# EAGLE board MicroView-Panel-v10 (EAGLE 6.5.0), part 1 of 3
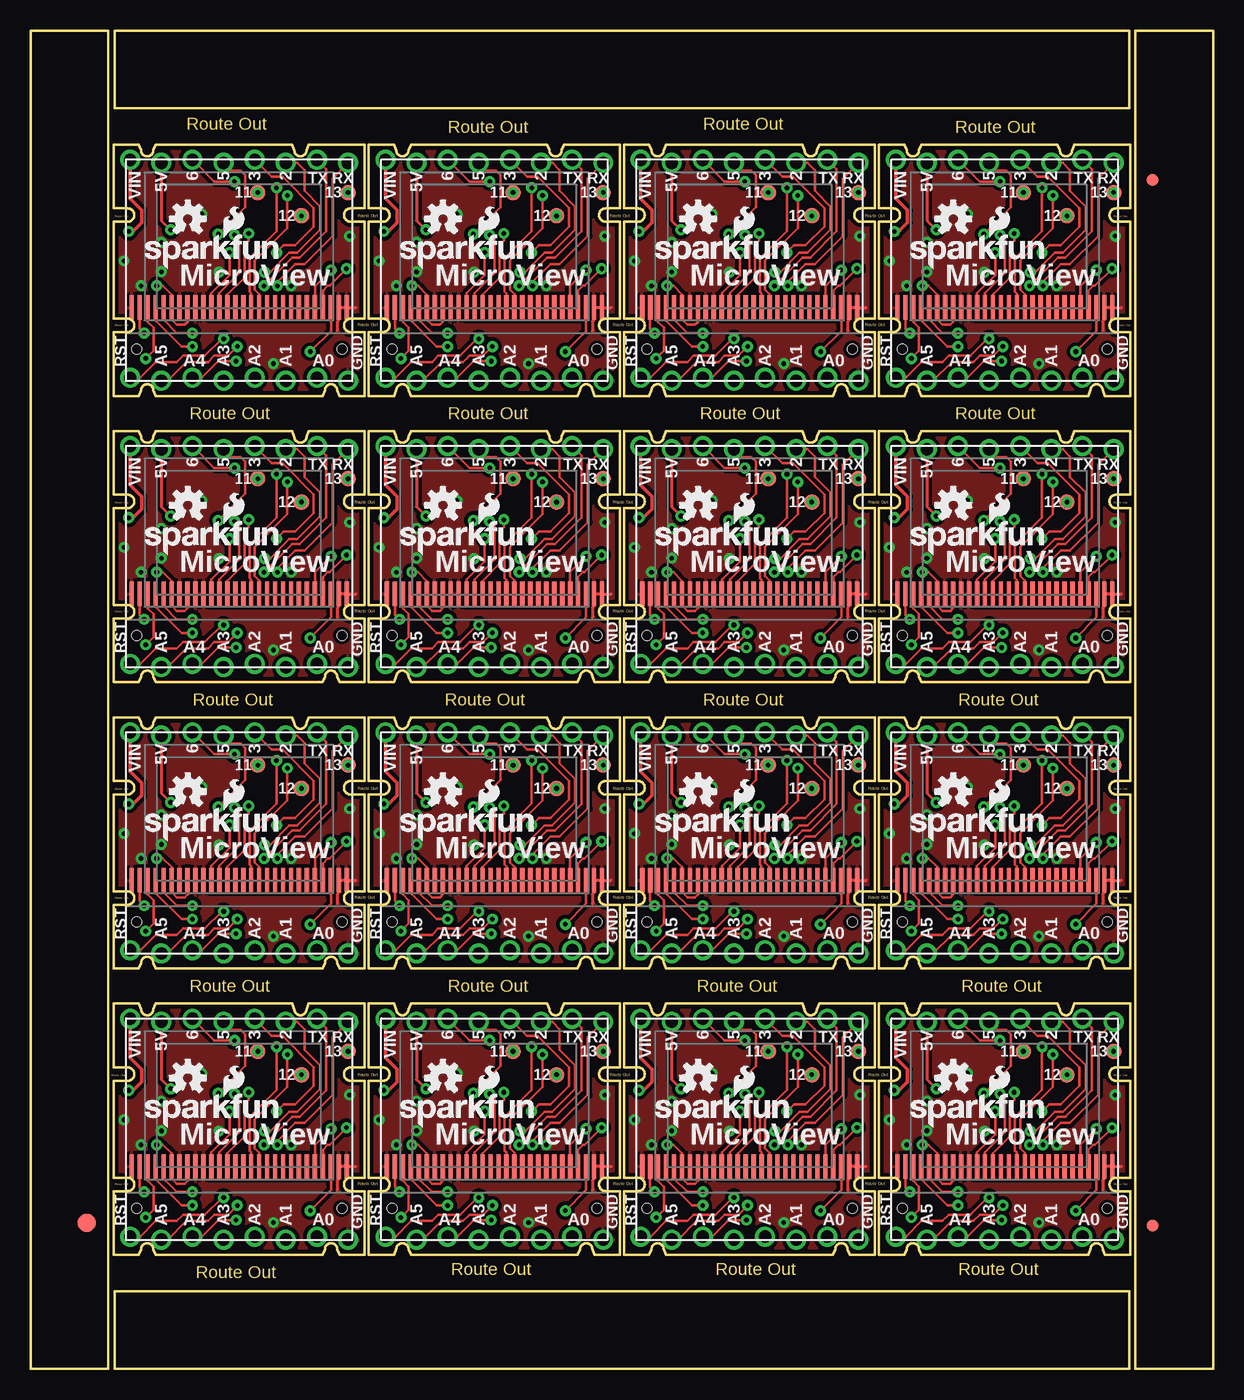
[diagram p0: board, top side]
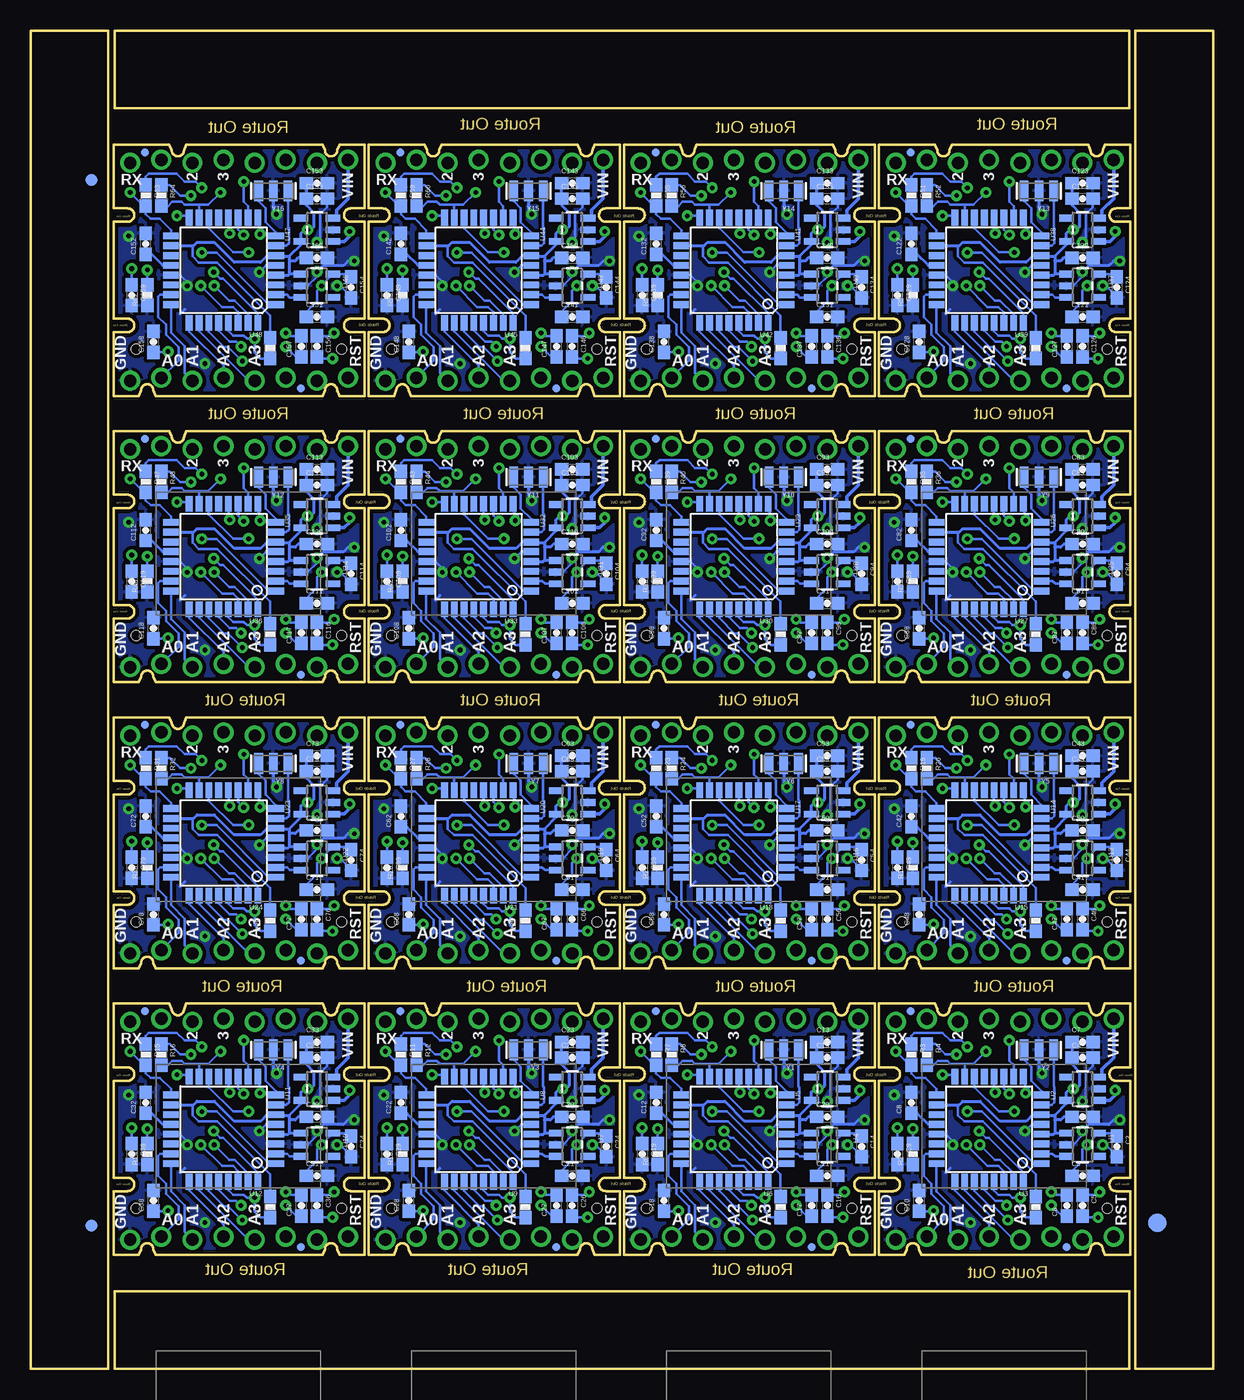
[diagram p1: board, bottom side, seen from below]

Size 96.52 x 109.22 mm. Coordinates in mm from the lower left corner, seen from the top.
Outline: 600 segments
Copper layers (1*16): Top 0.035mm / dielectric 1.5mm / Bottom 0.035mm
Design rules "SparkFun-2-layer *": minimum track width 7mil, minimum drill 15mil, track to track 8mil, track to pad 8mil, pad to pad 8mil, via to via 8mil, smd to smd 8mil, copper to edge 8mil, drill to drill 8mil, minimum pad ring 12mil, minimum via ring 10mil, stop-mask expansion 4mil, vias tented up to drill 20mil, thermal gap 10mil

## Footprints (pad centres in the part's own frame; a part is rotated, then mirrored left to right if it is on the bottom)
0603-CAP = smd 1.1 x 1: 1 -0.85,0; 2 0.85,0
FIDUCIAL-1.5X3 = smd 1.5 x 1.5: 1 0,0
FIDUCIAL-1X2 = smd 1 x 1: 1 0,0
MICRO-FIDUCIAL = smd 0.635 x 0.635: 1 0,0
MV-DIP16 = drill 1.016: 1 -8.89,-8.763; 2 -6.35,-9.017; 3 -3.81,-8.763; 4 -1.27,-9.017; 5 1.27,-8.763; 6 3.81,-9.017; 7 6.35,-8.763; 8 8.89,-9.017; 9 8.89,8.763; 10 6.35,9.017; 11 3.81,8.763; 12 1.27,9.017; 13 -1.27,8.763; 14 -3.81,9.017; 15 -6.35,8.763; 16 -8.89,9.017
OLED-0.66-64X48 = smd 0.35 x 2: 1 0,0; 2 0.65,0; 3 1.3,0; 4 1.95,0; 5 2.6,0; 6 3.25,0; 7 3.9,0; 8 4.55,0; 9 5.2,0; 10 5.85,0; 11 6.5,0; 12 7.15,0; 13 7.8,0; 14 8.45,0; 15 9.1,0; 16 9.75,0; 17 10.4,0; 18 11.05,0; 19 11.7,0; 20 12.35,0; 21 13,0; 22 13.65,0; 23 14.3,0; 24 14.95,0; 25 15.6,0; 26 16.25,0; 27 16.9,0; 28 17.55,0 | hole 0.8: 17.15,-3.4; 0.4,-3.4
0603-RES = smd 1.1 x 1: 1 -0.85,0; 2 0.85,0
PAD.03X.05 = smd 1.27 x 1.27: P$1 0,0
SOT23-5 = smd 0.55 x 1.2: 1 -0.95,-1.3; 2 0,-1.3; 3 0.95,-1.3; 4 0.95,1.3; 5 -0.95,1.3
TQFP32-08 = smd 1.27 x 0.559: 1 -4.293,2.8; 2 -4.293,2; 3 -4.293,1.2; 4 -4.293,0.4; 5 -4.293,-0.4; 6 -4.293,-1.2; 7 -4.293,-2; 8 -4.293,-2.8; 17 4.293,-2.8; 18 4.293,-2; 19 4.293,-1.2; 20 4.293,-0.4; 21 4.293,0.4; 22 4.293,1.2; 23 4.293,2; 24 4.293,2.8 | smd 0.559 x 1.27: 9 -2.8,-4.293; 10 -2,-4.293; 11 -1.2,-4.293; 12 -0.4,-4.293; 13 0.4,-4.293; 14 1.2,-4.293; 15 2,-4.293; 16 2.8,-4.293; 25 2.8,4.293; 26 2,4.293; 27 1.2,4.293; 28 0.4,4.293; 29 -0.4,4.293; 30 -1.2,4.293; 31 -2,4.293; 32 -2.8,4.293
RESONATOR-SMD = smd 0.7 x 1.7: 1 -1.2,0; 2 0,0; 3 1.2,0

## Placement (x,y rotation side)
C1  1.0uF  [0603-CAP]  10.67,20.57 0 bottom
C2  1.0uF  [0603-CAP]  7.87,18.16 270 bottom
C3  0.1uF  [0603-CAP]  10.67,15.75 0 bottom
C4  1.0uF  [0603-CAP]  10.67,25.4 0 bottom
C5  1.0uF  [0603-CAP]  10.67,13.34 270 bottom
C6  1.0uF  [0603-CAP]  11.94,13.34 90 bottom
C7  0.1uF  [0603-CAP]  10.67,26.67 0 bottom
C8  0.1uF  [0603-CAP]  24.64,21.72 90 bottom
C9  2.2uF  [0603-CAP]  25.78,17.53 270 bottom
C10  2.2uF  [0603-CAP]  24,13.72 90 bottom
C11  0.1uF  [0603-CAP]  31.5,15.75 0 bottom
C12  0.1uF  [0603-CAP]  45.47,21.72 90 bottom
C13  0.1uF  [0603-CAP]  31.5,26.67 0 bottom
C14  1.0uF  [0603-CAP]  28.7,18.16 270 bottom
C15  1.0uF  [0603-CAP]  31.5,25.4 0 bottom
C16  1.0uF  [0603-CAP]  31.5,13.34 270 bottom
C17  1.0uF  [0603-CAP]  32.77,13.34 90 bottom
C18  2.2uF  [0603-CAP]  44.83,13.72 90 bottom
C19  2.2uF  [0603-CAP]  46.61,17.53 270 bottom
C20  1.0uF  [0603-CAP]  31.5,20.57 0 bottom
C21  0.1uF  [0603-CAP]  52.32,15.75 0 bottom
C22  0.1uF  [0603-CAP]  66.29,21.72 90 bottom
C23  0.1uF  [0603-CAP]  52.32,26.67 0 bottom
C24  1.0uF  [0603-CAP]  49.53,18.16 270 bottom
C25  1.0uF  [0603-CAP]  52.32,25.4 0 bottom
C26  1.0uF  [0603-CAP]  52.32,13.34 270 bottom
C27  1.0uF  [0603-CAP]  53.59,13.34 90 bottom
C28  2.2uF  [0603-CAP]  65.66,13.72 90 bottom
C29  2.2uF  [0603-CAP]  67.44,17.53 270 bottom
C30  1.0uF  [0603-CAP]  52.32,20.57 0 bottom
C31  0.1uF  [0603-CAP]  73.15,15.75 0 bottom
C32  0.1uF  [0603-CAP]  87.12,21.72 90 bottom
C33  0.1uF  [0603-CAP]  73.15,26.67 0 bottom
C34  1.0uF  [0603-CAP]  70.36,18.16 270 bottom
C35  1.0uF  [0603-CAP]  73.15,25.4 0 bottom
C36  1.0uF  [0603-CAP]  73.15,13.34 270 bottom
C37  1.0uF  [0603-CAP]  74.42,13.34 90 bottom
C38  2.2uF  [0603-CAP]  86.49,13.72 90 bottom
C39  2.2uF  [0603-CAP]  88.27,17.53 270 bottom
C40  1.0uF  [0603-CAP]  73.15,20.57 0 bottom
C41  0.1uF  [0603-CAP]  10.67,39.12 0 bottom
C42  0.1uF  [0603-CAP]  24.64,45.09 90 bottom
C43  0.1uF  [0603-CAP]  10.67,50.04 0 bottom
C44  1.0uF  [0603-CAP]  7.87,41.53 270 bottom
C45  1.0uF  [0603-CAP]  10.67,48.77 0 bottom
C46  1.0uF  [0603-CAP]  10.67,36.7 270 bottom
C47  1.0uF  [0603-CAP]  11.94,36.7 90 bottom
C48  2.2uF  [0603-CAP]  24,37.08 90 bottom
C49  2.2uF  [0603-CAP]  25.78,40.89 270 bottom
C50  1.0uF  [0603-CAP]  10.67,43.94 0 bottom
C51  0.1uF  [0603-CAP]  31.5,39.12 0 bottom
C52  0.1uF  [0603-CAP]  45.47,45.09 90 bottom
C53  0.1uF  [0603-CAP]  31.5,50.04 0 bottom
C54  1.0uF  [0603-CAP]  28.7,41.53 270 bottom
C55  1.0uF  [0603-CAP]  31.5,48.77 0 bottom
C56  1.0uF  [0603-CAP]  31.5,36.7 270 bottom
C57  1.0uF  [0603-CAP]  32.77,36.7 90 bottom
C58  2.2uF  [0603-CAP]  44.83,37.08 90 bottom
C59  2.2uF  [0603-CAP]  46.61,40.89 270 bottom
C60  1.0uF  [0603-CAP]  31.5,43.94 0 bottom
C61  0.1uF  [0603-CAP]  52.32,39.12 0 bottom
C62  0.1uF  [0603-CAP]  66.29,45.09 90 bottom
C63  0.1uF  [0603-CAP]  52.32,50.04 0 bottom
C64  1.0uF  [0603-CAP]  49.53,41.53 270 bottom
C65  1.0uF  [0603-CAP]  52.32,48.77 0 bottom
C66  1.0uF  [0603-CAP]  52.32,36.7 270 bottom
C67  1.0uF  [0603-CAP]  53.59,36.7 90 bottom
C68  2.2uF  [0603-CAP]  65.66,37.08 90 bottom
C69  2.2uF  [0603-CAP]  67.44,40.89 270 bottom
C70  1.0uF  [0603-CAP]  52.32,43.94 0 bottom
C71  0.1uF  [0603-CAP]  73.15,39.12 0 bottom
C72  0.1uF  [0603-CAP]  87.12,45.09 90 bottom
C73  0.1uF  [0603-CAP]  73.15,50.04 0 bottom
C74  1.0uF  [0603-CAP]  70.36,41.53 270 bottom
C75  1.0uF  [0603-CAP]  73.15,48.77 0 bottom
C76  1.0uF  [0603-CAP]  73.15,36.7 270 bottom
C77  1.0uF  [0603-CAP]  74.42,36.7 90 bottom
C78  2.2uF  [0603-CAP]  86.49,37.08 90 bottom
C79  2.2uF  [0603-CAP]  88.27,40.89 270 bottom
C80  1.0uF  [0603-CAP]  73.15,43.94 0 bottom
C81  0.1uF  [0603-CAP]  10.67,62.48 0 bottom
C82  0.1uF  [0603-CAP]  24.64,68.45 90 bottom
C83  0.1uF  [0603-CAP]  10.67,73.41 0 bottom
C84  1.0uF  [0603-CAP]  7.87,64.9 270 bottom
C85  1.0uF  [0603-CAP]  10.67,72.14 0 bottom
C86  1.0uF  [0603-CAP]  10.67,60.07 270 bottom
C87  1.0uF  [0603-CAP]  11.94,60.07 90 bottom
C88  2.2uF  [0603-CAP]  24,60.45 90 bottom
C89  2.2uF  [0603-CAP]  25.78,64.26 270 bottom
C90  1.0uF  [0603-CAP]  10.67,67.31 0 bottom
C91  0.1uF  [0603-CAP]  31.5,62.48 0 bottom
C92  0.1uF  [0603-CAP]  45.47,68.45 90 bottom
C93  0.1uF  [0603-CAP]  31.5,73.41 0 bottom
C94  1.0uF  [0603-CAP]  28.7,64.9 270 bottom
C95  1.0uF  [0603-CAP]  31.5,72.14 0 bottom
C96  1.0uF  [0603-CAP]  31.5,60.07 270 bottom
C97  1.0uF  [0603-CAP]  32.77,60.07 90 bottom
C98  2.2uF  [0603-CAP]  44.83,60.45 90 bottom
C99  2.2uF  [0603-CAP]  46.61,64.26 270 bottom
C100  1.0uF  [0603-CAP]  31.5,67.31 0 bottom
C101  0.1uF  [0603-CAP]  52.32,62.48 0 bottom
C102  0.1uF  [0603-CAP]  66.29,68.45 90 bottom
C103  0.1uF  [0603-CAP]  52.32,73.41 0 bottom
C104  1.0uF  [0603-CAP]  49.53,64.9 270 bottom
C105  1.0uF  [0603-CAP]  52.32,72.14 0 bottom
C106  1.0uF  [0603-CAP]  52.32,60.07 270 bottom
C107  1.0uF  [0603-CAP]  53.59,60.07 90 bottom
C108  2.2uF  [0603-CAP]  65.66,60.45 90 bottom
C109  2.2uF  [0603-CAP]  67.44,64.26 270 bottom
C110  1.0uF  [0603-CAP]  52.32,67.31 0 bottom
C111  0.1uF  [0603-CAP]  73.15,62.48 0 bottom
C112  0.1uF  [0603-CAP]  87.12,68.45 90 bottom
C113  0.1uF  [0603-CAP]  73.15,73.41 0 bottom
C114  1.0uF  [0603-CAP]  70.36,64.9 270 bottom
C115  1.0uF  [0603-CAP]  73.15,72.14 0 bottom
C116  1.0uF  [0603-CAP]  73.15,60.07 270 bottom
C117  1.0uF  [0603-CAP]  74.42,60.07 90 bottom
C118  2.2uF  [0603-CAP]  86.49,60.45 90 bottom
C119  2.2uF  [0603-CAP]  88.27,64.26 270 bottom
C120  1.0uF  [0603-CAP]  73.15,67.31 0 bottom
C121  0.1uF  [0603-CAP]  10.67,85.85 0 bottom
C122  0.1uF  [0603-CAP]  24.64,91.82 90 bottom
C123  0.1uF  [0603-CAP]  10.67,96.77 0 bottom
C124  1.0uF  [0603-CAP]  7.87,88.27 270 bottom
C125  1.0uF  [0603-CAP]  10.67,95.5 0 bottom
C126  1.0uF  [0603-CAP]  10.67,83.44 270 bottom
C127  1.0uF  [0603-CAP]  11.94,83.44 90 bottom
C128  2.2uF  [0603-CAP]  24,83.82 90 bottom
C129  2.2uF  [0603-CAP]  25.78,87.63 270 bottom
C130  1.0uF  [0603-CAP]  10.67,90.68 0 bottom
C131  0.1uF  [0603-CAP]  31.5,85.85 0 bottom
C132  0.1uF  [0603-CAP]  45.47,91.82 90 bottom
C133  0.1uF  [0603-CAP]  31.5,96.77 0 bottom
C134  1.0uF  [0603-CAP]  28.7,88.27 270 bottom
C135  1.0uF  [0603-CAP]  31.5,95.5 0 bottom
C136  1.0uF  [0603-CAP]  31.5,83.44 270 bottom
C137  1.0uF  [0603-CAP]  32.77,83.44 90 bottom
C138  2.2uF  [0603-CAP]  44.83,83.82 90 bottom
C139  2.2uF  [0603-CAP]  46.61,87.63 270 bottom
C140  1.0uF  [0603-CAP]  31.5,90.68 0 bottom
C141  0.1uF  [0603-CAP]  52.32,85.85 0 bottom
C142  0.1uF  [0603-CAP]  66.29,91.82 90 bottom
C143  0.1uF  [0603-CAP]  52.32,96.77 0 bottom
C144  1.0uF  [0603-CAP]  49.53,88.27 270 bottom
C145  1.0uF  [0603-CAP]  52.32,95.5 0 bottom
C146  1.0uF  [0603-CAP]  52.32,83.44 270 bottom
C147  1.0uF  [0603-CAP]  53.59,83.44 90 bottom
C148  2.2uF  [0603-CAP]  65.66,83.82 90 bottom
C149  2.2uF  [0603-CAP]  67.44,87.63 270 bottom
C150  1.0uF  [0603-CAP]  52.32,90.68 0 bottom
C151  0.1uF  [0603-CAP]  73.15,85.85 0 bottom
C152  0.1uF  [0603-CAP]  87.12,91.82 90 bottom
C153  0.1uF  [0603-CAP]  73.15,96.77 0 bottom
C154  1.0uF  [0603-CAP]  70.36,88.27 270 bottom
C155  1.0uF  [0603-CAP]  73.15,95.5 0 bottom
C156  1.0uF  [0603-CAP]  73.15,83.44 270 bottom
C157  1.0uF  [0603-CAP]  74.42,83.44 90 bottom
C158  2.2uF  [0603-CAP]  86.49,83.82 90 bottom
C159  2.2uF  [0603-CAP]  88.27,87.63 270 bottom
C160  1.0uF  [0603-CAP]  73.15,90.68 0 bottom
E$1  [FIDUCIAL-1.5X3]  4.57,11.94 0 top
E$2  [FIDUCIAL-1.5X3]  4.57,11.94 0 bottom
E$3  [FIDUCIAL-1X2]  91.57,11.68 0 bottom
E$4  [FIDUCIAL-1X2]  91.57,97.03 180 bottom
E$7  [FIDUCIAL-1X2]  91.57,97.03 180 top
E$8  [FIDUCIAL-1X2]  91.57,11.68 0 top
FID1  FIDUCIALUFIDUCIAL  [MICRO-FIDUCIAL]  24.69,29.18 0 bottom
FID2  FIDUCIALUFIDUCIAL  [MICRO-FIDUCIAL]  45.52,29.18 0 bottom
FID3  FIDUCIALUFIDUCIAL  [MICRO-FIDUCIAL]  11.96,9.93 0 bottom
FID4  FIDUCIALUFIDUCIAL  [MICRO-FIDUCIAL]  32.79,9.93 0 bottom
FID5  FIDUCIALUFIDUCIAL  [MICRO-FIDUCIAL]  66.34,29.18 0 bottom
FID6  FIDUCIALUFIDUCIAL  [MICRO-FIDUCIAL]  53.62,9.93 0 bottom
FID7  FIDUCIALUFIDUCIAL  [MICRO-FIDUCIAL]  87.17,29.18 0 bottom
FID8  FIDUCIALUFIDUCIAL  [MICRO-FIDUCIAL]  74.45,9.93 0 bottom
FID9  FIDUCIALUFIDUCIAL  [MICRO-FIDUCIAL]  24.69,52.55 0 bottom
FID10  FIDUCIALUFIDUCIAL  [MICRO-FIDUCIAL]  11.96,33.3 0 bottom
FID11  FIDUCIALUFIDUCIAL  [MICRO-FIDUCIAL]  45.52,52.55 0 bottom
FID12  FIDUCIALUFIDUCIAL  [MICRO-FIDUCIAL]  32.79,33.3 0 bottom
FID13  FIDUCIALUFIDUCIAL  [MICRO-FIDUCIAL]  66.34,52.55 0 bottom
FID14  FIDUCIALUFIDUCIAL  [MICRO-FIDUCIAL]  53.62,33.3 0 bottom
FID15  FIDUCIALUFIDUCIAL  [MICRO-FIDUCIAL]  87.17,52.55 0 bottom
FID16  FIDUCIALUFIDUCIAL  [MICRO-FIDUCIAL]  74.45,33.3 0 bottom
FID17  FIDUCIALUFIDUCIAL  [MICRO-FIDUCIAL]  24.69,75.92 0 bottom
FID18  FIDUCIALUFIDUCIAL  [MICRO-FIDUCIAL]  11.96,56.67 0 bottom
FID19  FIDUCIALUFIDUCIAL  [MICRO-FIDUCIAL]  45.52,75.92 0 bottom
FID20  FIDUCIALUFIDUCIAL  [MICRO-FIDUCIAL]  32.79,56.67 0 bottom
FID21  FIDUCIALUFIDUCIAL  [MICRO-FIDUCIAL]  66.34,75.92 0 bottom
FID22  FIDUCIALUFIDUCIAL  [MICRO-FIDUCIAL]  53.62,56.67 0 bottom
FID23  FIDUCIALUFIDUCIAL  [MICRO-FIDUCIAL]  87.17,75.92 0 bottom
FID24  FIDUCIALUFIDUCIAL  [MICRO-FIDUCIAL]  74.45,56.67 0 bottom
FID25  FIDUCIALUFIDUCIAL  [MICRO-FIDUCIAL]  24.69,99.29 0 bottom
FID26  FIDUCIALUFIDUCIAL  [MICRO-FIDUCIAL]  11.96,80.04 0 bottom
FID27  FIDUCIALUFIDUCIAL  [MICRO-FIDUCIAL]  45.52,99.29 0 bottom
FID28  FIDUCIALUFIDUCIAL  [MICRO-FIDUCIAL]  32.79,80.04 0 bottom
FID29  FIDUCIALUFIDUCIAL  [MICRO-FIDUCIAL]  66.34,99.29 0 bottom
FID30  FIDUCIALUFIDUCIAL  [MICRO-FIDUCIAL]  53.62,80.04 0 bottom
FID31  FIDUCIALUFIDUCIAL  [MICRO-FIDUCIAL]  87.17,99.29 0 bottom
FID32  FIDUCIALUFIDUCIAL  [MICRO-FIDUCIAL]  74.45,80.04 0 bottom
J1  OLED_SCREEN  [OLED-SCREEN]  17.02,19.56 0 top
J2  MICROVIEW-16  [MV-DIP16]  17.02,19.56 0 top
J3  MICROVIEW-16  [MV-DIP16]  37.85,19.56 0 top
J4  OLED_SCREEN  [OLED-SCREEN]  37.85,19.56 0 top
J5  MICROVIEW-16  [MV-DIP16]  58.67,19.56 0 top
J6  OLED_SCREEN  [OLED-SCREEN]  58.67,19.56 0 top
J7  MICROVIEW-16  [MV-DIP16]  79.5,19.56 0 top
J8  OLED_SCREEN  [OLED-SCREEN]  79.5,19.56 0 top
J9  MICROVIEW-16  [MV-DIP16]  17.02,42.93 0 top
J10  OLED_SCREEN  [OLED-SCREEN]  17.02,42.93 0 top
J11  MICROVIEW-16  [MV-DIP16]  37.85,42.93 0 top
J12  OLED_SCREEN  [OLED-SCREEN]  37.85,42.93 0 top
J13  MICROVIEW-16  [MV-DIP16]  58.67,42.93 0 top
J14  OLED_SCREEN  [OLED-SCREEN]  58.67,42.93 0 top
J15  MICROVIEW-16  [MV-DIP16]  79.5,42.93 0 top
J16  OLED_SCREEN  [OLED-SCREEN]  79.5,42.93 0 top
J17  MICROVIEW-16  [MV-DIP16]  17.02,66.29 0 top
J18  OLED_SCREEN  [OLED-SCREEN]  17.02,66.29 0 top
J19  MICROVIEW-16  [MV-DIP16]  37.85,66.29 0 top
J20  OLED_SCREEN  [OLED-SCREEN]  37.85,66.29 0 top
J21  MICROVIEW-16  [MV-DIP16]  58.67,66.29 0 top
J22  OLED_SCREEN  [OLED-SCREEN]  58.67,66.29 0 top
J23  MICROVIEW-16  [MV-DIP16]  79.5,66.29 0 top
J24  OLED_SCREEN  [OLED-SCREEN]  79.5,66.29 0 top
J25  MICROVIEW-16  [MV-DIP16]  17.02,89.66 0 top
J26  OLED_SCREEN  [OLED-SCREEN]  17.02,89.66 0 top
J27  MICROVIEW-16  [MV-DIP16]  37.85,89.66 0 top
J28  OLED_SCREEN  [OLED-SCREEN]  37.85,89.66 0 top
J29  MICROVIEW-16  [MV-DIP16]  58.67,89.66 0 top
J30  OLED_SCREEN  [OLED-SCREEN]  58.67,89.66 0 top
J31  MICROVIEW-16  [MV-DIP16]  79.5,89.66 0 top
J32  OLED_SCREEN  [OLED-SCREEN]  79.5,89.66 0 top
LOGO1  OSHW-LOGOS  [OSHW-LOGO-S]  12.83,23.75 0 top
LOGO2  OSHW-LOGOS  [OSHW-LOGO-S]  33.66,23.75 0 top
LOGO3  SFE_LOGO_NAME_FLAME.1_INCH  [SFE_LOGO_NAME_FLAME_.1]  29.72,19.56 0 top
LOGO4  SFE_LOGO_NAME_FLAME.1_INCH  [SFE_LOGO_NAME_FLAME_.1]  8.89,19.56 0 top
LOGO5  OSHW-LOGOS  [OSHW-LOGO-S]  54.48,23.75 0 top
LOGO6  SFE_LOGO_NAME_FLAME.1_INCH  [SFE_LOGO_NAME_FLAME_.1]  50.55,19.56 0 top
LOGO7  OSHW-LOGOS  [OSHW-LOGO-S]  75.31,23.75 0 top
LOGO8  SFE_LOGO_NAME_FLAME.1_INCH  [SFE_LOGO_NAME_FLAME_.1]  71.37,19.56 0 top
LOGO9  OSHW-LOGOS  [OSHW-LOGO-S]  12.83,47.12 0 top
LOGO10  SFE_LOGO_NAME_FLAME.1_INCH  [SFE_LOGO_NAME_FLAME_.1]  8.89,42.93 0 top
LOGO11  OSHW-LOGOS  [OSHW-LOGO-S]  33.66,47.12 0 top
LOGO12  SFE_LOGO_NAME_FLAME.1_INCH  [SFE_LOGO_NAME_FLAME_.1]  29.72,42.93 0 top
LOGO13  OSHW-LOGOS  [OSHW-LOGO-S]  54.48,47.12 0 top
LOGO14  SFE_LOGO_NAME_FLAME.1_INCH  [SFE_LOGO_NAME_FLAME_.1]  50.55,42.93 0 top
LOGO15  OSHW-LOGOS  [OSHW-LOGO-S]  75.31,47.12 0 top
LOGO16  SFE_LOGO_NAME_FLAME.1_INCH  [SFE_LOGO_NAME_FLAME_.1]  71.37,42.93 0 top
LOGO17  OSHW-LOGOS  [OSHW-LOGO-S]  12.83,70.48 0 top
LOGO18  SFE_LOGO_NAME_FLAME.1_INCH  [SFE_LOGO_NAME_FLAME_.1]  8.89,66.29 0 top
LOGO19  OSHW-LOGOS  [OSHW-LOGO-S]  33.66,70.48 0 top
LOGO20  SFE_LOGO_NAME_FLAME.1_INCH  [SFE_LOGO_NAME_FLAME_.1]  29.72,66.29 0 top
LOGO21  OSHW-LOGOS  [OSHW-LOGO-S]  54.48,70.48 0 top
LOGO22  SFE_LOGO_NAME_FLAME.1_INCH  [SFE_LOGO_NAME_FLAME_.1]  50.55,66.29 0 top
LOGO23  OSHW-LOGOS  [OSHW-LOGO-S]  75.31,70.48 0 top
LOGO24  SFE_LOGO_NAME_FLAME.1_INCH  [SFE_LOGO_NAME_FLAME_.1]  71.37,66.29 0 top
LOGO25  OSHW-LOGOS  [OSHW-LOGO-S]  12.83,93.85 0 top
LOGO26  SFE_LOGO_NAME_FLAME.1_INCH  [SFE_LOGO_NAME_FLAME_.1]  8.89,89.66 0 top
LOGO27  OSHW-LOGOS  [OSHW-LOGO-S]  33.66,93.85 0 top
LOGO28  SFE_LOGO_NAME_FLAME.1_INCH  [SFE_LOGO_NAME_FLAME_.1]  29.72,89.66 0 top
LOGO29  OSHW-LOGOS  [OSHW-LOGO-S]  54.48,93.85 0 top
LOGO30  SFE_LOGO_NAME_FLAME.1_INCH  [SFE_LOGO_NAME_FLAME_.1]  50.55,89.66 0 top
LOGO31  OSHW-LOGOS  [OSHW-LOGO-S]  75.31,93.85 0 top
LOGO32  SFE_LOGO_NAME_FLAME.1_INCH  [SFE_LOGO_NAME_FLAME_.1]  71.37,89.66 0 top
OLED1  OLED0.66  [OLED-0.66-64X48]  8.26,16.51 0 top
OLED2  OLED0.66  [OLED-0.66-64X48]  29.08,16.51 0 top
OLED3  OLED0.66  [OLED-0.66-64X48]  49.91,16.51 0 top
OLED4  OLED0.66  [OLED-0.66-64X48]  70.74,16.51 0 top
OLED5  OLED0.66  [OLED-0.66-64X48]  8.26,39.88 0 top
OLED6  OLED0.66  [OLED-0.66-64X48]  29.08,39.88 0 top
OLED7  OLED0.66  [OLED-0.66-64X48]  49.91,39.88 0 top
OLED8  OLED0.66  [OLED-0.66-64X48]  70.74,39.88 0 top
OLED9  OLED0.66  [OLED-0.66-64X48]  8.26,63.25 0 top
OLED10  OLED0.66  [OLED-0.66-64X48]  29.08,63.25 0 top
OLED11  OLED0.66  [OLED-0.66-64X48]  49.91,63.25 0 top
OLED12  OLED0.66  [OLED-0.66-64X48]  70.74,63.25 0 top
OLED13  OLED0.66  [OLED-0.66-64X48]  8.26,86.61 0 top
OLED14  OLED0.66  [OLED-0.66-64X48]  29.08,86.61 0 top
OLED15  OLED0.66  [OLED-0.66-64X48]  49.91,86.61 0 top
OLED16  OLED0.66  [OLED-0.66-64X48]  70.74,86.61 0 top
R1  10K  [0603-RES]  14.48,13.21 90 bottom
R2  390k  [0603-RES]  24.51,17.53 90 bottom
R3  1k  [0603-RES]  24.64,25.65 270 bottom
R4  1k  [0603-RES]  23.37,25.65 270 bottom
R5  10K  [0603-RES]  35.31,13.21 90 bottom
R6  390k  [0603-RES]  45.34,17.53 90 bottom
R7  1k  [0603-RES]  45.47,25.65 270 bottom
R8  1k  [0603-RES]  44.2,25.65 270 bottom
R9  10K  [0603-RES]  56.13,13.21 90 bottom
R10  390k  [0603-RES]  66.17,17.53 90 bottom
R11  1k  [0603-RES]  66.29,25.65 270 bottom
R12  1k  [0603-RES]  65.02,25.65 270 bottom
R13  10K  [0603-RES]  76.96,13.21 90 bottom
R14  390k  [0603-RES]  87,17.53 90 bottom
R15  1k  [0603-RES]  87.12,25.65 270 bottom
R16  1k  [0603-RES]  85.85,25.65 270 bottom
R17  10K  [0603-RES]  14.48,36.58 90 bottom
R18  390k  [0603-RES]  24.51,40.89 90 bottom
R19  1k  [0603-RES]  24.64,49.02 270 bottom
R20  1k  [0603-RES]  23.37,49.02 270 bottom
R21  10K  [0603-RES]  35.31,36.58 90 bottom
R22  390k  [0603-RES]  45.34,40.89 90 bottom
R23  1k  [0603-RES]  45.47,49.02 270 bottom
R24  1k  [0603-RES]  44.2,49.02 270 bottom
R25  10K  [0603-RES]  56.13,36.58 90 bottom
R26  390k  [0603-RES]  66.17,40.89 90 bottom
R27  1k  [0603-RES]  66.29,49.02 270 bottom
R28  1k  [0603-RES]  65.02,49.02 270 bottom
R29  10K  [0603-RES]  76.96,36.58 90 bottom
R30  390k  [0603-RES]  87,40.89 90 bottom
R31  1k  [0603-RES]  87.12,49.02 270 bottom
R32  1k  [0603-RES]  85.85,49.02 270 bottom
R33  10K  [0603-RES]  14.48,59.94 90 bottom
R34  390k  [0603-RES]  24.51,64.26 90 bottom
R35  1k  [0603-RES]  24.64,72.39 270 bottom
R36  1k  [0603-RES]  23.37,72.39 270 bottom
R37  10K  [0603-RES]  35.31,59.94 90 bottom
R38  390k  [0603-RES]  45.34,64.26 90 bottom
R39  1k  [0603-RES]  45.47,72.39 270 bottom
R40  1k  [0603-RES]  44.2,72.39 270 bottom
R41  10K  [0603-RES]  56.13,59.94 90 bottom
R42  390k  [0603-RES]  66.17,64.26 90 bottom
R43  1k  [0603-RES]  66.29,72.39 270 bottom
R44  1k  [0603-RES]  65.02,72.39 270 bottom
R45  10K  [0603-RES]  76.96,59.94 90 bottom
R46  390k  [0603-RES]  87,64.26 90 bottom
R47  1k  [0603-RES]  87.12,72.39 270 bottom
R48  1k  [0603-RES]  85.85,72.39 270 bottom
R49  10K  [0603-RES]  14.48,83.31 90 bottom
R50  390k  [0603-RES]  24.51,87.63 90 bottom
R51  1k  [0603-RES]  24.64,95.76 270 bottom
R52  1k  [0603-RES]  23.37,95.76 270 bottom
R53  10K  [0603-RES]  35.31,83.31 90 bottom
R54  390k  [0603-RES]  45.34,87.63 90 bottom
R55  1k  [0603-RES]  45.47,95.76 270 bottom
R56  1k  [0603-RES]  44.2,95.76 270 bottom
R57  10K  [0603-RES]  56.13,83.31 90 bottom
R58  390k  [0603-RES]  66.17,87.63 90 bottom
R59  1k  [0603-RES]  66.29,95.76 270 bottom
R60  1k  [0603-RES]  65.02,95.76 270 bottom
R61  10K  [0603-RES]  76.96,83.31 90 bottom
R62  390k  [0603-RES]  87,87.63 90 bottom
R63  1k  [0603-RES]  87.12,95.76 270 bottom
R64  1k  [0603-RES]  85.85,95.76 270 bottom
TP1  [PAD.03X.05]  22.1,24 0 top
TP2  [PAD.03X.05]  25.91,25.91 0 top
TP3  [PAD.03X.05]  18.54,25.91 0 top
TP4  [PAD.03X.05]  42.93,24 0 top
TP5  [PAD.03X.05]  46.74,25.91 0 top
TP6  [PAD.03X.05]  39.37,25.91 0 top
TP7  [PAD.03X.05]  63.75,24 0 top
TP8  [PAD.03X.05]  67.56,25.91 0 top
TP9  [PAD.03X.05]  60.2,25.91 0 top
TP10  [PAD.03X.05]  84.58,24 0 top
TP11  [PAD.03X.05]  88.39,25.91 0 top
TP12  [PAD.03X.05]  81.03,25.91 0 top
TP13  [PAD.03X.05]  22.1,47.37 0 top
TP14  [PAD.03X.05]  25.91,49.28 0 top
TP15  [PAD.03X.05]  18.54,49.28 0 top
TP16  [PAD.03X.05]  42.93,47.37 0 top
TP17  [PAD.03X.05]  46.74,49.28 0 top
TP18  [PAD.03X.05]  39.37,49.28 0 top
TP19  [PAD.03X.05]  63.75,47.37 0 top
TP20  [PAD.03X.05]  67.56,49.28 0 top
TP21  [PAD.03X.05]  60.2,49.28 0 top
TP22  [PAD.03X.05]  84.58,47.37 0 top
TP23  [PAD.03X.05]  88.39,49.28 0 top
TP24  [PAD.03X.05]  81.03,49.28 0 top
TP25  [PAD.03X.05]  22.1,70.74 0 top
TP26  [PAD.03X.05]  25.91,72.64 0 top
TP27  [PAD.03X.05]  18.54,72.64 0 top
TP28  [PAD.03X.05]  42.93,70.74 0 top
TP29  [PAD.03X.05]  46.74,72.64 0 top
TP30  [PAD.03X.05]  39.37,72.64 0 top
TP31  [PAD.03X.05]  63.75,70.74 0 top
TP32  [PAD.03X.05]  67.56,72.64 0 top
TP33  [PAD.03X.05]  60.2,72.64 0 top
TP34  [PAD.03X.05]  84.58,70.74 0 top
TP35  [PAD.03X.05]  88.39,72.64 0 top
TP36  [PAD.03X.05]  81.03,72.64 0 top
TP37  [PAD.03X.05]  22.1,94.11 0 top
TP38  [PAD.03X.05]  25.91,96.01 0 top
TP39  [PAD.03X.05]  18.54,96.01 0 top
TP40  [PAD.03X.05]  42.93,94.11 0 top
TP41  [PAD.03X.05]  46.74,96.01 0 top
TP42  [PAD.03X.05]  39.37,96.01 0 top
TP43  [PAD.03X.05]  63.75,94.11 0 top
TP44  [PAD.03X.05]  67.56,96.01 0 top
TP45  [PAD.03X.05]  60.2,96.01 0 top
TP46  [PAD.03X.05]  84.58,94.11 0 top
TP47  [PAD.03X.05]  88.39,96.01 0 top
TP48  [PAD.03X.05]  81.03,96.01 0 top
U1  MIC5205 3.3V  [SOT23-5]  10.67,18.29 270 bottom
U2  SPX3819M5-L-5-0  [SOT23-5]  10.67,22.86 90 bottom
U3  ATMEGA328P  [TQFP32-08]  18.29,19.56 180 bottom
U4  MIC5205 3.3V  [SOT23-5]  31.5,18.29 270 bottom
U5  SPX3819M5-L-5-0  [SOT23-5]  31.5,22.86 90 bottom
U6  ATMEGA328P  [TQFP32-08]  39.12,19.56 180 bottom
U7  MIC5205 3.3V  [SOT23-5]  52.32,18.29 270 bottom
U8  SPX3819M5-L-5-0  [SOT23-5]  52.32,22.86 90 bottom
U9  ATMEGA328P  [TQFP32-08]  59.94,19.56 180 bottom
U10  MIC5205 3.3V  [SOT23-5]  73.15,18.29 270 bottom
U11  SPX3819M5-L-5-0  [SOT23-5]  73.15,22.86 90 bottom
U12  ATMEGA328P  [TQFP32-08]  80.77,19.56 180 bottom
U13  MIC5205 3.3V  [SOT23-5]  10.67,41.66 270 bottom
U14  SPX3819M5-L-5-0  [SOT23-5]  10.67,46.23 90 bottom
U15  ATMEGA328P  [TQFP32-08]  18.29,42.93 180 bottom
U16  MIC5205 3.3V  [SOT23-5]  31.5,41.66 270 bottom
U17  SPX3819M5-L-5-0  [SOT23-5]  31.5,46.23 90 bottom
U18  ATMEGA328P  [TQFP32-08]  39.12,42.93 180 bottom
U19  MIC5205 3.3V  [SOT23-5]  52.32,41.66 270 bottom
U20  SPX3819M5-L-5-0  [SOT23-5]  52.32,46.23 90 bottom
U21  ATMEGA328P  [TQFP32-08]  59.94,42.93 180 bottom
U22  MIC5205 3.3V  [SOT23-5]  73.15,41.66 270 bottom
U23  SPX3819M5-L-5-0  [SOT23-5]  73.15,46.23 90 bottom
U24  ATMEGA328P  [TQFP32-08]  80.77,42.93 180 bottom
U25  MIC5205 3.3V  [SOT23-5]  10.67,65.02 270 bottom
U26  SPX3819M5-L-5-0  [SOT23-5]  10.67,69.6 90 bottom
U27  ATMEGA328P  [TQFP32-08]  18.29,66.29 180 bottom
U28  MIC5205 3.3V  [SOT23-5]  31.5,65.02 270 bottom
U29  SPX3819M5-L-5-0  [SOT23-5]  31.5,69.6 90 bottom
U30  ATMEGA328P  [TQFP32-08]  39.12,66.29 180 bottom
U31  MIC5205 3.3V  [SOT23-5]  52.32,65.02 270 bottom
U32  SPX3819M5-L-5-0  [SOT23-5]  52.32,69.6 90 bottom
U33  ATMEGA328P  [TQFP32-08]  59.94,66.29 180 bottom
U34  MIC5205 3.3V  [SOT23-5]  73.15,65.02 270 bottom
U35  SPX3819M5-L-5-0  [SOT23-5]  73.15,69.6 90 bottom
U36  ATMEGA328P  [TQFP32-08]  80.77,66.29 180 bottom
U37  MIC5205 3.3V  [SOT23-5]  10.67,88.39 270 bottom
U38  SPX3819M5-L-5-0  [SOT23-5]  10.67,92.96 90 bottom
U39  ATMEGA328P  [TQFP32-08]  18.29,89.66 180 bottom
U40  MIC5205 3.3V  [SOT23-5]  31.5,88.39 270 bottom
U41  SPX3819M5-L-5-0  [SOT23-5]  31.5,92.96 90 bottom
U42  ATMEGA328P  [TQFP32-08]  39.12,89.66 180 bottom
U43  MIC5205 3.3V  [SOT23-5]  52.32,88.39 270 bottom
U44  SPX3819M5-L-5-0  [SOT23-5]  52.32,92.96 90 bottom
U45  ATMEGA328P  [TQFP32-08]  59.94,89.66 180 bottom
U46  MIC5205 3.3V  [SOT23-5]  73.15,88.39 270 bottom
U47  SPX3819M5-L-5-0  [SOT23-5]  73.15,92.96 90 bottom
U48  ATMEGA328P  [TQFP32-08]  80.77,89.66 180 bottom
Y1  16MHz  [RESONATOR-SMD]  35.05,26.04 180 bottom
Y2  16MHz  [RESONATOR-SMD]  14.22,26.04 180 bottom
Y3  16MHz  [RESONATOR-SMD]  55.88,26.04 180 bottom
Y4  16MHz  [RESONATOR-SMD]  76.71,26.04 180 bottom
Y5  16MHz  [RESONATOR-SMD]  14.22,49.4 180 bottom
Y6  16MHz  [RESONATOR-SMD]  35.05,49.4 180 bottom
Y7  16MHz  [RESONATOR-SMD]  55.88,49.4 180 bottom
Y8  16MHz  [RESONATOR-SMD]  76.71,49.4 180 bottom
Y9  16MHz  [RESONATOR-SMD]  14.22,72.77 180 bottom
Y10  16MHz  [RESONATOR-SMD]  35.05,72.77 180 bottom
Y11  16MHz  [RESONATOR-SMD]  55.88,72.77 180 bottom
Y12  16MHz  [RESONATOR-SMD]  76.71,72.77 180 bottom
Y13  16MHz  [RESONATOR-SMD]  14.22,96.14 180 bottom
Y14  16MHz  [RESONATOR-SMD]  35.05,96.14 180 bottom
Y15  16MHz  [RESONATOR-SMD]  55.88,96.14 180 bottom
Y16  16MHz  [RESONATOR-SMD]  76.71,96.14 180 bottom

## Library data of the parts
C1 C2 C4-C6 C14-C17 C20 C24-C27 C30 C34-C37 C40 C44-C47 C50 C54-C57 C60 C64-C67 C70 C74-C77 C80 C84-C87 C90 C94-C97 C100 C104-C107 C110 C114-C117 C120 C124-C127 C130 C134-C137 C140 C144-C147 C150 C154-C157 C160 = SparkFun-Capacitors; PROD_ID: CAP-00868
C3 C7 C8 C11-C13 C21-C23 C31-C33 C41-C43 C51-C53 C61-C63 C71-C73 C81-C83 C91-C93 C101-C103 C111-C113 C121-C123 C131-C133 C141-C143 C151-C153 = SparkFun-Capacitors; PROD_ID: CAP-00810
C9 C10 C18 C19 C28 C29 C38 C39 C48 C49 C58 C59 C68 C69 C78 C79 C88 C89 C98 C99 C108 C109 C118 C119 C128 C129 C138 C139 C148 C149 C158 C159 = SparkFun-Capacitors; PROD_ID: CAP-07888
E$1 E$2 = SparkFun-Retired
E$3 E$4 E$7 E$8 FID1-FID32 LOGO1-LOGO32 = SparkFun-Aesthetics
J1-J32 OLED1-OLED16 Y1-Y16 = microView-temp
R1 R3-R5 R7-R9 R11-R13 R15-R17 R19-R21 R23-R25 R27-R29 R31-R33 R35-R37 R39-R41 R43-R45 R47-R49 R51-R53 R55-R57 R59-R61 R63 R64 = SparkFun-Resistors; PROD_ID: RES-00824
R2 R6 R10 R14 R18 R22 R26 R30 R34 R38 R42 R46 R50 R54 R58 R62 = SparkFun-Resistors
TP1-TP48 = SparkFun-Passives
U1 U4 U7 U10 U13 U16 U19 U22 U25 U28 U31 U34 U37 U40 U43 U46 = SparkFun-PowerIC; PROD_ID: VREG-00822
U2 U5 U8 U11 U14 U17 U20 U23 U26 U29 U32 U35 U38 U41 U44 U47 = SparkFun-PowerIC; PROD_ID: VREG-10107
U3 U6 U9 U12 U15 U18 U21 U24 U27 U30 U33 U36 U39 U42 U45 U48 = SparkFun-DigitalIC; PROD_ID: IC-09069

## Nets
3.3V: C2.1 C3.1 OLED1.6 OLED1.8 U1.5
3.3V1: C11.1 C14.1 OLED2.6 OLED2.8 U4.5
3.3V2: C21.1 C24.1 OLED3.6 OLED3.8 U7.5
3.3V3: C31.1 C34.1 OLED4.6 OLED4.8 U10.5
3.3V4: C41.1 C44.1 OLED5.6 OLED5.8 U13.5
3.3V5: C51.1 C54.1 OLED6.6 OLED6.8 U16.5
3.3V6: C61.1 C64.1 OLED7.6 OLED7.8 U19.5
3.3V7: C71.1 C74.1 OLED8.6 OLED8.8 U22.5
3.3V8: C81.1 C84.1 OLED9.6 OLED9.8 U25.5
3.3V9: C91.1 C94.1 OLED10.6 OLED10.8 U28.5
3.3V10: C101.1 C104.1 OLED11.6 OLED11.8 U31.5
3.3V11: C111.1 C114.1 OLED12.6 OLED12.8 U34.5
3.3V12: C121.1 C124.1 OLED13.6 OLED13.8 U37.5
3.3V13: C131.1 C134.1 OLED14.6 OLED14.8 U40.5
3.3V14: C141.1 C144.1 OLED15.6 OLED15.8 U43.5
3.3V15: C151.1 C154.1 OLED16.6 OLED16.8 U46.5
5V: C1.1 C4.1 C7.1 J2.15 R1.2 U1.1 U2.5 U3.4 U3.6 U3.18
5V1: C13.1 C15.1 C20.1 J3.15 R5.2 U4.1 U5.5 U6.4 U6.6 U6.18
5V2: C23.1 C25.1 C30.1 J5.15 R9.2 U7.1 U8.5 U9.4 U9.6 U9.18
5V3: C33.1 C35.1 C40.1 J7.15 R13.2 U10.1 U11.5 U12.4 U12.6 U12.18
5V4: C43.1 C45.1 C50.1 J9.15 R17.2 U13.1 U14.5 U15.4 U15.6 U15.18
5V5: C53.1 C55.1 C60.1 J11.15 R21.2 U16.1 U17.5 U18.4 U18.6 U18.18
5V6: C63.1 C65.1 C70.1 J13.15 R25.2 U19.1 U20.5 U21.4 U21.6 U21.18
5V7: C73.1 C75.1 C80.1 J15.15 R29.2 U22.1 U23.5 U24.4 U24.6 U24.18
5V8: C83.1 C85.1 C90.1 J17.15 R33.2 U25.1 U26.5 U27.4 U27.6 U27.18
5V9: C93.1 C95.1 C100.1 J19.15 R37.2 U28.1 U29.5 U30.4 U30.6 U30.18
5V10: C103.1 C105.1 C110.1 J21.15 R41.2 U31.1 U32.5 U33.4 U33.6 U33.18
5V11: C113.1 C115.1 C120.1 J23.15 R45.2 U34.1 U35.5 U36.4 U36.6 U36.18
5V12: C123.1 C125.1 C130.1 J25.15 R49.2 U37.1 U38.5 U39.4 U39.6 U39.18
5V13: C133.1 C135.1 C140.1 J27.15 R53.2 U40.1 U41.5 U42.4 U42.6 U42.18
5V14: C143.1 C145.1 C150.1 J29.15 R57.2 U43.1 U44.5 U45.4 U45.6 U45.18
5V15: C153.1 C155.1 C160.1 J31.15 R61.2 U46.1 U47.5 U48.4 U48.6 U48.18
A0: J2.7 U3.23
A1: J2.6 U3.24
A2: J2.5 U3.25
A3: J2.4 U3.26
A4: J2.3 U3.27
A5: J2.2 U3.28
A6: J3.7 U6.23
A7: J3.6 U6.24
A8: J3.5 U6.25
A9: J3.4 U6.26
A10: J3.3 U6.27
A11: J3.2 U6.28
A12: J5.7 U9.23
A13: J5.6 U9.24
A14: J5.5 U9.25
A15: J5.4 U9.26
A16: J5.3 U9.27
A17: J5.2 U9.28
A18: J7.7 U12.23
A19: J7.6 U12.24
A20: J7.5 U12.25
A21: J7.4 U12.26
A22: J7.3 U12.27
A23: J7.2 U12.28
A24: J9.7 U15.23
A25: J9.6 U15.24
A26: J9.5 U15.25
A27: J9.4 U15.26
A28: J9.3 U15.27
A29: J9.2 U15.28
A30: J11.7 U18.23
A31: J11.6 U18.24
A32: J11.5 U18.25
A33: J11.4 U18.26
A34: J11.3 U18.27
A35: J11.2 U18.28
A36: J13.7 U21.23
A37: J13.6 U21.24
A38: J13.5 U21.25
A39: J13.4 U21.26
A40: J13.3 U21.27
A41: J13.2 U21.28
A42: J15.7 U24.23
A43: J15.6 U24.24
A44: J15.5 U24.25
A45: J15.4 U24.26
A46: J15.3 U24.27
A47: J15.2 U24.28
A48: J17.7 U27.23
A49: J17.6 U27.24
A50: J17.5 U27.25
A51: J17.4 U27.26
A52: J17.3 U27.27
A53: J17.2 U27.28
A54: J19.7 U30.23
A55: J19.6 U30.24
A56: J19.5 U30.25
A57: J19.4 U30.26
A58: J19.3 U30.27
A59: J19.2 U30.28
A60: J21.7 U33.23
A61: J21.6 U33.24
A62: J21.5 U33.25
A63: J21.4 U33.26
A64: J21.3 U33.27
A65: J21.2 U33.28
A66: J23.7 U36.23
A67: J23.6 U36.24
A68: J23.5 U36.25
A69: J23.4 U36.26
A70: J23.3 U36.27
A71: J23.2 U36.28
A72: J25.7 U39.23
A73: J25.6 U39.24
A74: J25.5 U39.25
A75: J25.4 U39.26
A76: J25.3 U39.27
A77: J25.2 U39.28
A78: J27.7 U42.23
A79: J27.6 U42.24
A80: J27.5 U42.25
A81: J27.4 U42.26
A82: J27.3 U42.27
A83: J27.2 U42.28
A84: J29.7 U45.23
A85: J29.6 U45.24
A86: J29.5 U45.25
A87: J29.4 U45.26
A88: J29.3 U45.27
A89: J29.2 U45.28
A90: J31.7 U48.23
A91: J31.6 U48.24
A92: J31.5 U48.25
A93: J31.4 U48.26
A94: J31.3 U48.27
A95: J31.2 U48.28
C1N: C6.2 OLED1.5
C1N1: C17.2 OLED2.5
C1N2: C27.2 OLED3.5
C1N3: C37.2 OLED4.5
C1N4: C47.2 OLED5.5
C1N5: C57.2 OLED6.5
C1N6: C67.2 OLED7.5
C1N7: C77.2 OLED8.5
C1N8: C87.2 OLED9.5
C1N9: C97.2 OLED10.5
C1N10: C107.2 OLED11.5
C1N11: C117.2 OLED12.5
C1N12: C127.2 OLED13.5
C1N13: C137.2 OLED14.5
C1N14: C147.2 OLED15.5
C1N15: C157.2 OLED16.5
C1P: C6.1 OLED1.4
C1P1: C17.1 OLED2.4
C1P2: C27.1 OLED3.4
C1P3: C37.1 OLED4.4
C1P4: C47.1 OLED5.4
C1P5: C57.1 OLED6.4
C1P6: C67.1 OLED7.4
C1P7: C77.1 OLED8.4
C1P8: C87.1 OLED9.4
C1P9: C97.1 OLED10.4
C1P10: C107.1 OLED11.4
C1P11: C117.1 OLED12.4
C1P12: C127.1 OLED13.4
C1P13: C137.1 OLED14.4
C1P14: C147.1 OLED15.4
C1P15: C157.1 OLED16.4
C2N: C5.2 OLED1.3
C2N1: C16.2 OLED2.3
C2N2: C26.2 OLED3.3
C2N3: C36.2 OLED4.3
C2N4: C46.2 OLED5.3
C2N5: C56.2 OLED6.3
C2N6: C66.2 OLED7.3
C2N7: C76.2 OLED8.3
C2N8: C86.2 OLED9.3
C2N9: C96.2 OLED10.3
C2N10: C106.2 OLED11.3
C2N11: C116.2 OLED12.3
C2N12: C126.2 OLED13.3
C2N13: C136.2 OLED14.3
C2N14: C146.2 OLED15.3
C2N15: C156.2 OLED16.3
C2P: C5.1 OLED1.2
C2P1: C16.1 OLED2.2
C2P2: C26.1 OLED3.2
C2P3: C36.1 OLED4.2
C2P4: C46.1 OLED5.2
C2P5: C56.1 OLED6.2
C2P6: C66.1 OLED7.2
C2P7: C76.1 OLED8.2
C2P8: C86.1 OLED9.2
C2P9: C96.1 OLED10.2
C2P10: C106.1 OLED11.2
C2P11: C116.1 OLED12.2
C2P12: C126.1 OLED13.2
C2P13: C136.1 OLED14.2
C2P14: C146.1 OLED15.2
C2P15: C156.1 OLED16.2
D1: J3.11 U6.32
D2: J2.11 U3.32
D3: J2.12 U3.1
D4: J3.12 U6.1
D4/3.3V_EN: U1.3 U3.2
D4/3.3V_EN1: U4.3 U6.2
D4/3.3V_EN2: U7.3 U9.2
D4/3.3V_EN3: U10.3 U12.2
D4/3.3V_EN4: U13.3 U15.2
D4/3.3V_EN5: U16.3 U18.2
D4/3.3V_EN6: U19.3 U21.2
D4/3.3V_EN7: U22.3 U24.2
D4/3.3V_EN8: U25.3 U27.2
D4/3.3V_EN9: U28.3 U30.2
D4/3.3V_EN10: U31.3 U33.2
D4/3.3V_EN11: U34.3 U36.2
D4/3.3V_EN12: U37.3 U39.2
D4/3.3V_EN13: U40.3 U42.2
D4/3.3V_EN14: U43.3 U45.2
D4/3.3V_EN15: U46.3 U48.2
D5: J2.13 U3.9
D6: J2.14 U3.10
D7: J3.13 U6.9
D7/!RESET!: OLED1.12 U3.11
D7/!RESET!1: OLED2.12 U6.11
D7/!RESET!2: OLED3.12 U9.11
D7/!RESET!3: OLED4.12 U12.11
D7/!RESET!4: OLED5.12 U15.11
D7/!RESET!5: OLED6.12 U18.11
D7/!RESET!6: OLED7.12 U21.11
D7/!RESET!7: OLED8.12 U24.11
D7/!RESET!8: OLED9.12 U27.11
D7/!RESET!9: OLED10.12 U30.11
D7/!RESET!10: OLED11.12 U33.11
D7/!RESET!11: OLED12.12 U36.11
D7/!RESET!12: OLED13.12 U39.11
D7/!RESET!13: OLED14.12 U42.11
D7/!RESET!14: OLED15.12 U45.11
D7/!RESET!15: OLED16.12 U48.11
D8: J3.14 U6.10
D8/D!C!: OLED1.13 U3.12
D8/D!C!1: OLED2.13 U6.12
D8/D!C!2: OLED3.13 U9.12
D8/D!C!3: OLED4.13 U12.12
D8/D!C!4: OLED5.13 U15.12
D8/D!C!5: OLED6.13 U18.12
D8/D!C!6: OLED7.13 U21.12
D8/D!C!7: OLED8.13 U24.12
D8/D!C!8: OLED9.13 U27.12
D8/D!C!9: OLED10.13 U30.12
D8/D!C!10: OLED11.13 U33.12
D8/D!C!11: OLED12.13 U36.12
D8/D!C!12: OLED13.13 U39.12
D8/D!C!13: OLED14.13 U42.12
D8/D!C!14: OLED15.13 U45.12
D8/D!C!15: OLED16.13 U48.12
D9: R7.2 TP5.P$1 U6.17
D10: R8.2 TP6.P$1 U6.15
D10/SS: OLED1.11 U3.14
D10/SS1: OLED2.11 U6.14
D10/SS2: OLED3.11 U9.14
D10/SS3: OLED4.11 U12.14
D10/SS4: OLED5.11 U15.14
D10/SS5: OLED6.11 U18.14
D10/SS6: OLED7.11 U21.14
D10/SS7: OLED8.11 U24.14
D10/SS8: OLED9.11 U27.14
D10/SS9: OLED10.11 U30.14
D10/SS10: OLED11.11 U33.14
D10/SS11: OLED12.11 U36.14
D10/SS12: OLED13.11 U39.14
D10/SS13: OLED14.11 U42.14
D10/SS14: OLED15.11 U45.14
D10/SS15: OLED16.11 U48.14
D11: R4.2 TP3.P$1 U3.15
D11/MOSI: OLED1.17 R4.1
D11/MOSI1: OLED2.17 R8.1
D11/MOSI2: OLED3.17 R12.1
D11/MOSI3: OLED4.17 R16.1
D11/MOSI4: OLED5.17 R20.1
D11/MOSI5: OLED6.17 R24.1
D11/MOSI6: OLED7.17 R28.1
D11/MOSI7: OLED8.17 R32.1
D11/MOSI8: OLED9.17 R36.1
D11/MOSI9: OLED10.17 R40.1
D11/MOSI10: OLED11.17 R44.1
D11/MOSI11: OLED12.17 R48.1
D11/MOSI12: OLED13.17 R52.1
D11/MOSI13: OLED14.17 R56.1
D11/MOSI14: OLED15.17 R60.1
D11/MOSI15: OLED16.17 R64.1
D12: J5.11 U9.32
D12/MISO: TP1.P$1 U3.16
D12/MISO1: TP4.P$1 U6.16
D12/MISO2: TP7.P$1 U9.16
D12/MISO3: TP10.P$1 U12.16
D12/MISO4: TP13.P$1 U15.16
D12/MISO5: TP16.P$1 U18.16
D12/MISO6: TP19.P$1 U21.16
D12/MISO7: TP22.P$1 U24.16
D12/MISO8: TP25.P$1 U27.16
D12/MISO9: TP28.P$1 U30.16
D12/MISO10: TP31.P$1 U33.16
D12/MISO11: TP34.P$1 U36.16
D12/MISO12: TP37.P$1 U39.16
D12/MISO13: TP40.P$1 U42.16
D12/MISO14: TP43.P$1 U45.16
D12/MISO15: TP46.P$1 U48.16
D13: R3.2 TP2.P$1 U3.17
D13/SCK: OLED1.16 R3.1
D13/SCK1: OLED2.16 R7.1
D13/SCK2: OLED3.16 R11.1
D13/SCK3: OLED4.16 R15.1
D13/SCK4: OLED5.16 R19.1
D13/SCK5: OLED6.16 R23.1
D13/SCK6: OLED7.16 R27.1
D13/SCK7: OLED8.16 R31.1
D13/SCK8: OLED9.16 R35.1
D13/SCK9: OLED10.16 R39.1
D13/SCK10: OLED11.16 R43.1
D13/SCK11: OLED12.16 R47.1
D13/SCK12: OLED13.16 R51.1
D13/SCK13: OLED14.16 R55.1
D13/SCK14: OLED15.16 R59.1
D13/SCK15: OLED16.16 R63.1
D14: J5.12 U9.1
D15: J5.13 U9.9
D16: J5.14 U9.10
D17: R11.2 TP8.P$1 U9.17
D18: R12.2 TP9.P$1 U9.15
D19: J7.11 U12.32
D20: J7.12 U12.1
D21: J7.13 U12.9
D22: J7.14 U12.10
D23: R15.2 TP11.P$1 U12.17
D24: R16.2 TP12.P$1 U12.15
D25: J9.11 U15.32
D26: J9.12 U15.1
D27: J9.13 U15.9
D28: J9.14 U15.10
D29: R19.2 TP14.P$1 U15.17
D30: R20.2 TP15.P$1 U15.15
D31: J11.11 U18.32
D32: J11.12 U18.1
D33: J11.13 U18.9
D34: J11.14 U18.10
D35: R23.2 TP17.P$1 U18.17
D36: R24.2 TP18.P$1 U18.15
D37: J13.11 U21.32
D38: J13.12 U21.1
D39: J13.13 U21.9
D40: J13.14 U21.10
D41: R27.2 TP20.P$1 U21.17
D42: R28.2 TP21.P$1 U21.15
D43: J15.11 U24.32
D44: J15.12 U24.1
D45: J15.13 U24.9
D46: J15.14 U24.10
D47: R31.2 TP23.P$1 U24.17
D48: R32.2 TP24.P$1 U24.15
D49: J17.11 U27.32
D50: J17.12 U27.1
D51: J17.13 U27.9
D52: J17.14 U27.10
D53: R35.2 TP26.P$1 U27.17
D54: R36.2 TP27.P$1 U27.15
D55: J19.11 U30.32
D56: J19.12 U30.1
D57: J19.13 U30.9
D58: J19.14 U30.10
D59: R39.2 TP29.P$1 U30.17
D60: R40.2 TP30.P$1 U30.15
D61: J21.11 U33.32
D62: J21.12 U33.1
D63: J21.13 U33.9
D64: J21.14 U33.10
D65: R43.2 TP32.P$1 U33.17
D66: R44.2 TP33.P$1 U33.15
D67: J23.11 U36.32
D68: J23.12 U36.1
D69: J23.13 U36.9
D70: J23.14 U36.10
D71: R47.2 TP35.P$1 U36.17
D72: R48.2 TP36.P$1 U36.15
D73: J25.11 U39.32
D74: J25.12 U39.1
D75: J25.13 U39.9
D76: J25.14 U39.10
D77: R51.2 TP38.P$1 U39.17
D78: R52.2 TP39.P$1 U39.15
D79: J27.11 U42.32
D80: J27.12 U42.1
D81: J27.13 U42.9
D82: J27.14 U42.10
D83: R55.2 TP41.P$1 U42.17
D84: R56.2 TP42.P$1 U42.15
D85: J29.11 U45.32
D86: J29.12 U45.1
D87: J29.13 U45.9
D88: J29.14 U45.10
D89: R59.2 TP44.P$1 U45.17
D90: R60.2 TP45.P$1 U45.15
D91: J31.11 U48.32
D92: J31.12 U48.1
D93: J31.13 U48.9
D94: J31.14 U48.10
D95: R63.2 TP47.P$1 U48.17
D96: R64.2 TP48.P$1 U48.15
GND: C1.2 C2.2 C3.2 C4.2 C7.2 C8.2 C9.2 C10.2 J2.8 OLED1.1 OLED1.7 OLED1.9 OLED1.10 OLED1.27 OLED1.28 R2.1 U1.2 U2.2 U3.3 U3.5 U3.21 Y2.2
GND1: C11.2 C12.2 C13.2 C14.2 C15.2 C18.2 C19.2 C20.2 J3.8 OLED2.1 OLED2.7 OLED2.9 OLED2.10 OLED2.27 OLED2.28 R6.1 U4.2 U5.2 U6.3 U6.5 U6.21 Y1.2
GND2: C21.2 C22.2 C23.2 C24.2 C25.2 C28.2 C29.2 C30.2 J5.8 OLED3.1 OLED3.7 OLED3.9 OLED3.10 OLED3.27 OLED3.28 R10.1 U7.2 U8.2 U9.3 U9.5 U9.21 Y3.2
GND3: C31.2 C32.2 C33.2 C34.2 C35.2 C38.2 C39.2 C40.2 J7.8 OLED4.1 OLED4.7 OLED4.9 OLED4.10 OLED4.27 OLED4.28 R14.1 U10.2 U11.2 U12.3 U12.5 U12.21 Y4.2
GND4: C41.2 C42.2 C43.2 C44.2 C45.2 C48.2 C49.2 C50.2 J9.8 OLED5.1 OLED5.7 OLED5.9 OLED5.10 OLED5.27 OLED5.28 R18.1 U13.2 U14.2 U15.3 U15.5 U15.21 Y5.2
GND5: C51.2 C52.2 C53.2 C54.2 C55.2 C58.2 C59.2 C60.2 J11.8 OLED6.1 OLED6.7 OLED6.9 OLED6.10 OLED6.27 OLED6.28 R22.1 U16.2 U17.2 U18.3 U18.5 U18.21 Y6.2
GND6: C61.2 C62.2 C63.2 C64.2 C65.2 C68.2 C69.2 C70.2 J13.8 OLED7.1 OLED7.7 OLED7.9 OLED7.10 OLED7.27 OLED7.28 R26.1 U19.2 U20.2 U21.3 U21.5 U21.21 Y7.2
GND7: C71.2 C72.2 C73.2 C74.2 C75.2 C78.2 C79.2 C80.2 J15.8 OLED8.1 OLED8.7 OLED8.9 OLED8.10 OLED8.27 OLED8.28 R30.1 U22.2 U23.2 U24.3 U24.5 U24.21 Y8.2
GND8: C81.2 C82.2 C83.2 C84.2 C85.2 C88.2 C89.2 C90.2 J17.8 OLED9.1 OLED9.7 OLED9.9 OLED9.10 OLED9.27 OLED9.28 R34.1 U25.2 U26.2 U27.3 U27.5 U27.21 Y9.2
GND9: C91.2 C92.2 C93.2 C94.2 C95.2 C98.2 C99.2 C100.2 J19.8 OLED10.1 OLED10.7 OLED10.9 OLED10.10 OLED10.27 OLED10.28 R38.1 U28.2 U29.2 U30.3 U30.5 U30.21 Y10.2
GND10: C101.2 C102.2 C103.2 C104.2 C105.2 C108.2 C109.2 C110.2 J21.8 OLED11.1 OLED11.7 OLED11.9 OLED11.10 OLED11.27 OLED11.28 R42.1 U31.2 U32.2 U33.3 U33.5 U33.21 Y11.2
GND11: C111.2 C112.2 C113.2 C114.2 C115.2 C118.2 C119.2 C120.2 J23.8 OLED12.1 OLED12.7 OLED12.9 OLED12.10 OLED12.27 OLED12.28 R46.1 U34.2 U35.2 U36.3 U36.5 U36.21 Y12.2
GND12: C121.2 C122.2 C123.2 C124.2 C125.2 C128.2 C129.2 C130.2 J25.8 OLED13.1 OLED13.7 OLED13.9 OLED13.10 OLED13.27 OLED13.28 R50.1 U37.2 U38.2 U39.3 U39.5 U39.21 Y13.2
GND13: C131.2 C132.2 C133.2 C134.2 C135.2 C138.2 C139.2 C140.2 J27.8 OLED14.1 OLED14.7 OLED14.9 OLED14.10 OLED14.27 OLED14.28 R54.1 U40.2 U41.2 U42.3 U42.5 U42.21 Y14.2
GND14: C141.2 C142.2 C143.2 C144.2 C145.2 C148.2 C149.2 C150.2 J29.8 OLED15.1 OLED15.7 OLED15.9 OLED15.10 OLED15.27 OLED15.28 R58.1 U43.2 U44.2 U45.3 U45.5 U45.21 Y15.2
GND15: C151.2 C152.2 C153.2 C154.2 C155.2 C158.2 C159.2 C160.2 J31.8 OLED16.1 OLED16.7 OLED16.9 OLED16.10 OLED16.27 OLED16.28 R62.1 U46.2 U47.2 U48.3 U48.5 U48.21 Y16.2
N$1: C10.1 OLED1.26
N$2: C9.1 OLED1.25
N$3: OLED1.24 R2.2
N$4: C18.1 OLED2.26
N$5: C19.1 OLED2.25
N$6: OLED2.24 R6.2
N$7: U6.7 Y1.1
N$8: U3.7 Y2.1
N$9: U3.8 Y2.3
N$10: C8.1 U3.20
N$11: U6.8 Y1.3
N$12: C12.1 U6.20
N$13: C28.1 OLED3.26
N$14: C29.1 OLED3.25
N$15: OLED3.24 R10.2
N$16: U9.7 Y3.1
N$17: U9.8 Y3.3
N$18: C22.1 U9.20
N$19: C38.1 OLED4.26
N$20: C39.1 OLED4.25
N$21: OLED4.24 R14.2
N$22: U12.7 Y4.1
N$23: U12.8 Y4.3
N$24: C32.1 U12.20
N$25: C48.1 OLED5.26
N$26: C49.1 OLED5.25
N$27: OLED5.24 R18.2
N$28: U15.7 Y5.1
N$29: U15.8 Y5.3
N$30: C42.1 U15.20
N$31: C58.1 OLED6.26
N$32: C59.1 OLED6.25
N$33: OLED6.24 R22.2
N$34: U18.7 Y6.1
N$35: U18.8 Y6.3
N$36: C52.1 U18.20
N$37: C68.1 OLED7.26
N$38: C69.1 OLED7.25
N$39: OLED7.24 R26.2
N$40: U21.7 Y7.1
N$41: U21.8 Y7.3
N$42: C62.1 U21.20
N$43: C78.1 OLED8.26
N$44: C79.1 OLED8.25
N$45: OLED8.24 R30.2
N$46: U24.7 Y8.1
N$47: U24.8 Y8.3
N$48: C72.1 U24.20
N$49: C88.1 OLED9.26
N$50: C89.1 OLED9.25
N$51: OLED9.24 R34.2
N$52: U27.7 Y9.1
N$53: U27.8 Y9.3
N$54: C82.1 U27.20
N$55: C98.1 OLED10.26
N$56: C99.1 OLED10.25
N$57: OLED10.24 R38.2
N$58: U30.7 Y10.1
N$59: U30.8 Y10.3
N$60: C92.1 U30.20
N$61: C108.1 OLED11.26
N$62: C109.1 OLED11.25
N$63: OLED11.24 R42.2
N$64: U33.7 Y11.1
N$65: U33.8 Y11.3
N$66: C102.1 U33.20
N$67: C118.1 OLED12.26
N$68: C119.1 OLED12.25
N$69: OLED12.24 R46.2
N$70: U36.7 Y12.1
N$71: U36.8 Y12.3
N$72: C112.1 U36.20
N$73: C128.1 OLED13.26
N$74: C129.1 OLED13.25
N$75: OLED13.24 R50.2
N$76: U39.7 Y13.1
N$77: U39.8 Y13.3
N$78: C122.1 U39.20
N$79: C138.1 OLED14.26
N$80: C139.1 OLED14.25
N$81: OLED14.24 R54.2
N$82: U42.7 Y14.1
N$83: U42.8 Y14.3
N$84: C132.1 U42.20
N$85: C148.1 OLED15.26
N$86: C149.1 OLED15.25
N$87: OLED15.24 R58.2
N$88: U45.7 Y15.1
N$89: U45.8 Y15.3
N$90: C142.1 U45.20
N$91: C158.1 OLED16.26
N$92: C159.1 OLED16.25
N$93: OLED16.24 R62.2
N$94: U48.7 Y16.1
N$95: U48.8 Y16.3
N$96: C152.1 U48.20
RESET: J2.1 R1.1 U3.29
RESET1: J3.1 R5.1 U6.29
RESET2: J5.1 R9.1 U9.29
RESET3: J7.1 R13.1 U12.29
RESET4: J9.1 R17.1 U15.29
RESET5: J11.1 R21.1 U18.29
RESET6: J13.1 R25.1 U21.29
RESET7: J15.1 R29.1 U24.29
RESET8: J17.1 R33.1 U27.29
RESET9: J19.1 R37.1 U30.29
RESET10: J21.1 R41.1 U33.29
RESET11: J23.1 R45.1 U36.29
RESET12: J25.1 R49.1 U39.29
RESET13: J27.1 R53.1 U42.29
RESET14: J29.1 R57.1 U45.29
RESET15: J31.1 R61.1 U48.29
RXD: J2.9 U3.30
RXD1: J3.9 U6.30
RXD2: J5.9 U9.30
RXD3: J7.9 U12.30
RXD4: J9.9 U15.30
RXD5: J11.9 U18.30
RXD6: J13.9 U21.30
RXD7: J15.9 U24.30
RXD8: J17.9 U27.30
RXD9: J19.9 U30.30
RXD10: J21.9 U33.30
RXD11: J23.9 U36.30
RXD12: J25.9 U39.30
RXD13: J27.9 U42.30
RXD14: J29.9 U45.30
RXD15: J31.9 U48.30
TXD: J2.10 U3.31
TXD1: J3.10 U6.31
TXD2: J5.10 U9.31
TXD3: J7.10 U12.31
TXD4: J9.10 U15.31
TXD5: J11.10 U18.31
TXD6: J13.10 U21.31
TXD7: J15.10 U24.31
TXD8: J17.10 U27.31
TXD9: J19.10 U30.31
TXD10: J21.10 U33.31
TXD11: J23.10 U36.31
TXD12: J25.10 U39.31
TXD13: J27.10 U42.31
TXD14: J29.10 U45.31
TXD15: J31.10 U48.31
VIN: J2.16 U2.1 U2.3
VIN1: J3.16 U5.1 U5.3
VIN2: J5.16 U8.1 U8.3
VIN3: J7.16 U11.1 U11.3
VIN4: J9.16 U14.1 U14.3
VIN5: J11.16 U17.1 U17.3
VIN6: J13.16 U20.1 U20.3
VIN7: J15.16 U23.1 U23.3
VIN8: J17.16 U26.1 U26.3
VIN9: J19.16 U29.1 U29.3
VIN10: J21.16 U32.1 U32.3
VIN11: J23.16 U35.1 U35.3
VIN12: J25.16 U38.1 U38.3
VIN13: J27.16 U41.1 U41.3
VIN14: J29.16 U44.1 U44.3
VIN15: J31.16 U47.1 U47.3

## Tracks (layer width: path | path; a pad name or v marks a point on that pad's centre or on a via)
3.3V  (via drill 0.38)
  Top 0.203: OLED1.8 12.8,15.35 12.57,15.11 11.94,15.11 11.51,15.55 OLED1.6 11.51,17.58 10.79,18.29 v10.29,18.29
  Bottom 0.203: v10.29,18.29 10.03,18.54 10.03,18.57 U1.5 8.1,19.24 C2.1 | 10.41,18.03 10.41,18.16 v10.29,18.29 | C3.1 11.52,16.17 10.67,17.02 10.67,17.91 v10.29,18.29
3.3V1  (via drill 0.38)
  Top 0.203: OLED2.8 33.63,15.35 33.4,15.11 32.77,15.11 32.33,15.55 OLED2.6 32.33,17.58 31.62,18.29 v31.11,18.29
  Bottom 0.203: v31.11,18.29 30.86,18.54 30.86,18.57 U4.5 28.93,19.24 C14.1 | 31.24,18.03 31.24,18.16 v31.11,18.29 | C11.1 32.35,16.17 31.5,17.02 31.5,17.91 v31.11,18.29
3.3V2  (via drill 0.38)
  Top 0.203: OLED3.8 54.46,15.35 54.23,15.11 53.59,15.11 53.16,15.55 OLED3.6 53.16,17.58 52.45,18.29 v51.94,18.29
  Bottom 0.203: v51.94,18.29 51.69,18.54 51.69,18.57 U7.5 49.76,19.24 C24.1 | 52.07,18.03 52.07,18.16 v51.94,18.29 | C21.1 53.17,16.17 52.32,17.02 52.32,17.91 v51.94,18.29
3.3V3  (via drill 0.38)
  Top 0.203: OLED4.8 75.29,15.35 75.06,15.11 74.42,15.11 73.99,15.55 OLED4.6 73.99,17.58 73.28,18.29 v72.77,18.29
  Bottom 0.203: v72.77,18.29 72.52,18.54 72.52,18.57 U10.5 70.58,19.24 C34.1 | 72.9,18.03 72.9,18.16 v72.77,18.29 | C31.1 74,16.17 73.15,17.02 73.15,17.91 v72.77,18.29
3.3V4  (via drill 0.38)
  Top 0.203: OLED5.8 12.8,38.71 12.57,38.48 11.94,38.48 11.51,38.91 OLED5.6 11.51,40.95 10.79,41.66 v10.29,41.66
  Bottom 0.203: v10.29,41.66 10.03,41.91 10.03,41.94 U13.5 8.1,42.61 C44.1 | 10.41,41.4 10.41,41.53 v10.29,41.66 | C41.1 11.52,39.54 10.67,40.39 10.67,41.27 v10.29,41.66
3.3V5  (via drill 0.38)
  Top 0.203: OLED6.8 33.63,38.71 33.4,38.48 32.77,38.48 32.33,38.91 OLED6.6 32.33,40.95 31.62,41.66 v31.11,41.66
  Bottom 0.203: v31.11,41.66 30.86,41.91 30.86,41.94 U16.5 28.93,42.61 C54.1 | 31.24,41.4 31.24,41.53 v31.11,41.66 | C51.1 32.35,39.54 31.5,40.39 31.5,41.27 v31.11,41.66
3.3V6  (via drill 0.38)
  Top 0.203: OLED7.8 54.46,38.71 54.23,38.48 53.59,38.48 53.16,38.91 OLED7.6 53.16,40.95 52.45,41.66 v51.94,41.66
  Bottom 0.203: v51.94,41.66 51.69,41.91 51.69,41.94 U19.5 49.76,42.61 C64.1 | 52.07,41.4 52.07,41.53 v51.94,41.66 | C61.1 53.17,39.54 52.32,40.39 52.32,41.27 v51.94,41.66
3.3V7  (via drill 0.38)
  Top 0.203: OLED8.8 75.29,38.71 75.06,38.48 74.42,38.48 73.99,38.91 OLED8.6 73.99,40.95 73.28,41.66 v72.77,41.66
  Bottom 0.203: v72.77,41.66 72.52,41.91 72.52,41.94 U22.5 70.58,42.61 C74.1 | 72.9,41.4 72.9,41.53 v72.77,41.66 | C71.1 74,39.54 73.15,40.39 73.15,41.27 v72.77,41.66
3.3V8  (via drill 0.38)
  Top 0.203: OLED9.8 12.8,62.08 12.57,61.85 11.94,61.85 11.51,62.28 OLED9.6 11.51,64.31 10.79,65.02 v10.29,65.02
  Bottom 0.203: v10.29,65.02 10.03,65.28 10.03,65.31 U25.5 8.1,65.97 C84.1 | 10.41,64.77 10.41,64.9 v10.29,65.02 | C81.1 11.52,62.9 10.67,63.75 10.67,64.64 v10.29,65.02
3.3V9  (via drill 0.38)
  Top 0.203: OLED10.8 33.63,62.08 33.4,61.85 32.77,61.85 32.33,62.28 OLED10.6 32.33,64.31 31.62,65.02 v31.11,65.02
  Bottom 0.203: v31.11,65.02 30.86,65.28 30.86,65.31 U28.5 28.93,65.97 C94.1 | 31.24,64.77 31.24,64.9 v31.11,65.02 | C91.1 32.35,62.9 31.5,63.75 31.5,64.64 v31.11,65.02
3.3V10  (via drill 0.38)
  Top 0.203: OLED11.8 54.46,62.08 54.23,61.85 53.59,61.85 53.16,62.28 OLED11.6 53.16,64.31 52.45,65.02 v51.94,65.02
  Bottom 0.203: v51.94,65.02 51.69,65.28 51.69,65.31 U31.5 49.76,65.97 C104.1 | 52.07,64.77 52.07,64.9 v51.94,65.02 | C101.1 53.17,62.9 52.32,63.75 52.32,64.64 v51.94,65.02
3.3V11  (via drill 0.38)
  Top 0.203: OLED12.8 75.29,62.08 75.06,61.85 74.42,61.85 73.99,62.28 OLED12.6 73.99,64.31 73.28,65.02 v72.77,65.02
  Bottom 0.203: v72.77,65.02 72.52,65.28 72.52,65.31 U34.5 70.58,65.97 C114.1 | 72.9,64.77 72.9,64.9 v72.77,65.02 | C111.1 74,62.9 73.15,63.75 73.15,64.64 v72.77,65.02
3.3V12  (via drill 0.38)
  Top 0.203: OLED13.8 12.8,85.45 12.57,85.22 11.94,85.22 11.51,85.65 OLED13.6 11.51,87.68 10.79,88.39 v10.29,88.39
  Bottom 0.203: v10.29,88.39 10.03,88.65 10.03,88.68 U37.5 8.1,89.34 C124.1 | 10.41,88.14 10.41,88.27 v10.29,88.39 | C121.1 11.52,86.27 10.67,87.12 10.67,88.01 v10.29,88.39
3.3V13  (via drill 0.38)
  Top 0.203: OLED14.8 33.63,85.45 33.4,85.22 32.77,85.22 32.33,85.65 OLED14.6 32.33,87.68 31.62,88.39 v31.11,88.39
  Bottom 0.203: v31.11,88.39 30.86,88.65 30.86,88.68 U40.5 28.93,89.34 C134.1 | 31.24,88.14 31.24,88.27 v31.11,88.39 | C131.1 32.35,86.27 31.5,87.12 31.5,88.01 v31.11,88.39
3.3V14  (via drill 0.38)
  Top 0.203: OLED15.8 54.46,85.45 54.23,85.22 53.59,85.22 53.16,85.65 OLED15.6 53.16,87.68 52.45,88.39 v51.94,88.39
  Bottom 0.203: v51.94,88.39 51.69,88.65 51.69,88.68 U43.5 49.76,89.34 C144.1 | 52.07,88.14 52.07,88.27 v51.94,88.39 | C141.1 53.17,86.27 52.32,87.12 52.32,88.01 v51.94,88.39
3.3V15  (via drill 0.38)
  Top 0.203: OLED16.8 75.29,85.45 75.06,85.22 74.42,85.22 73.99,85.65 OLED16.6 73.99,87.68 73.28,88.39 v72.77,88.39
  Bottom 0.203: v72.77,88.39 72.52,88.65 72.52,88.68 U46.5 70.58,89.34 C154.1 | 72.9,88.14 72.9,88.27 v72.77,88.39 | C151.1 74,86.27 73.15,87.12 73.15,88.01 v72.77,88.39
5V  (via drill 0.38)
  Top 0.254: J2.15 10.67,23.62 v11.43,22.86
  Bottom 0.203: R1.2 14.48,15.88 18.8,20.19 20.32,20.19 20.83,20.7 20.83,21.46 20.73,21.56
  Bottom 0.254: U3.18 20.73,21.56 20.45,21.84 19.04,21.84 17.41,20.22 15.27,20.22 14.73,20.76 U3.6 13.93,20.7 12.94,20.7 | U3.4 13.02,19.16 12.94,19.24 | U1.1 12.94,19.24 | C7.1 C4.1 11.52,24.85 10.92,24.26 10.92,23.11 11.18,22.86 v11.43,22.86 11.68,22.86 11.97,22.58 U2.5 11.97,21.66 12.94,20.7 | 12.94,20.7 12.94,20.32 | 12.94,20.32 12.94,19.24 | C1.1 12.19,20.57 12.45,20.32 12.94,20.32
5V1  (via drill 0.38)
  Top 0.254: J3.15 31.5,23.62 v32.26,22.86
  Bottom 0.203: R5.2 35.31,15.88 39.62,20.19 41.15,20.19 41.66,20.7 41.66,21.46 41.56,21.56
  Bottom 0.254: U6.18 41.56,21.56 41.27,21.84 39.87,21.84 38.24,20.22 36.09,20.22 35.55,20.76 U6.6 34.76,20.7 33.76,20.7 | U6.4 33.84,19.16 33.76,19.24 | U4.1 33.76,19.24 | C13.1 C15.1 32.35,24.85 31.75,24.26 31.75,23.11 32,22.86 v32.26,22.86 32.51,22.86 32.8,22.58 U5.5 32.8,21.66 33.76,20.7 | 33.76,20.7 33.76,20.32 | 33.76,20.32 33.76,19.24 | C20.1 33.02,20.57 33.27,20.32 33.76,20.32
5V2  (via drill 0.38)
  Top 0.254: J5.15 52.32,23.62 v53.09,22.86
  Bottom 0.203: R9.2 56.13,15.88 60.45,20.19 61.98,20.19 62.48,20.7 62.48,21.46 62.39,21.56
  Bottom 0.254: U9.18 62.39,21.56 62.1,21.84 60.69,21.84 59.07,20.22 56.92,20.22 56.38,20.76 U9.6 55.59,20.7 54.59,20.7 | U9.4 54.67,19.16 54.59,19.24 | U7.1 54.59,19.24 | C23.1 C25.1 53.17,24.85 52.58,24.26 52.58,23.11 52.83,22.86 v53.09,22.86 53.34,22.86 53.62,22.58 U8.5 53.62,21.66 54.59,20.7 | 54.59,20.7 54.59,20.32 | 54.59,20.32 54.59,19.24 | C30.1 53.85,20.57 54.1,20.32 54.59,20.32
5V3  (via drill 0.38)
  Top 0.254: J7.15 73.15,23.62 v73.91,22.86
  Bottom 0.203: R13.2 76.96,15.88 81.28,20.19 82.8,20.19 83.31,20.7 83.31,21.46 83.22,21.56
  Bottom 0.254: U12.18 83.22,21.56 82.93,21.84 81.52,21.84 79.9,20.22 77.75,20.22 77.21,20.76 U12.6 76.42,20.7 75.42,20.7 | U12.4 75.5,19.16 75.42,19.24 | U10.1 75.42,19.24 | C33.1 C35.1 74,24.85 73.41,24.26 73.41,23.11 73.66,22.86 v73.91,22.86 74.17,22.86 74.45,22.58 U11.5 74.45,21.66 75.42,20.7 | 75.42,20.7 75.42,20.32 | 75.42,20.32 75.42,19.24 | C40.1 74.68,20.57 74.93,20.32 75.42,20.32
5V4  (via drill 0.38)
  Top 0.254: J9.15 10.67,46.99 v11.43,46.23
  Bottom 0.203: R17.2 14.48,39.24 18.8,43.56 20.32,43.56 20.83,44.07 20.83,44.83 20.73,44.93
  Bottom 0.254: U15.18 20.73,44.93 20.45,45.21 19.04,45.21 17.41,43.59 15.27,43.59 14.73,44.13 U15.6 13.93,44.06 12.94,44.06 | U15.4 13.02,42.53 12.94,42.61 | U13.1 12.94,42.61 | C43.1 C45.1 11.52,48.22 10.92,47.62 10.92,46.48 11.18,46.23 v11.43,46.23 11.68,46.23 11.97,45.94 U14.5 11.97,45.03 12.94,44.06 | 12.94,44.06 12.94,43.69 | 12.94,43.69 12.94,42.61 | C50.1 12.19,43.94 12.45,43.69 12.94,43.69
5V5  (via drill 0.38)
  Top 0.254: J11.15 31.5,46.99 v32.26,46.23
  Bottom 0.203: R21.2 35.31,39.24 39.62,43.56 41.15,43.56 41.66,44.07 41.66,44.83 41.56,44.93